# Altium PCB CH32xx0xV-R0-1v0.PcbDoc (part 2 of 3)
Units mil, origin at the board's own origin, x right, y up, seen from the top; angles counter-clockwise.
Board outline 3661.42 x 3267.72 mil, 2 copper layers (Top Layer, Bottom Layer); 68 components, 119 nets, 417 pads, 746 vias.
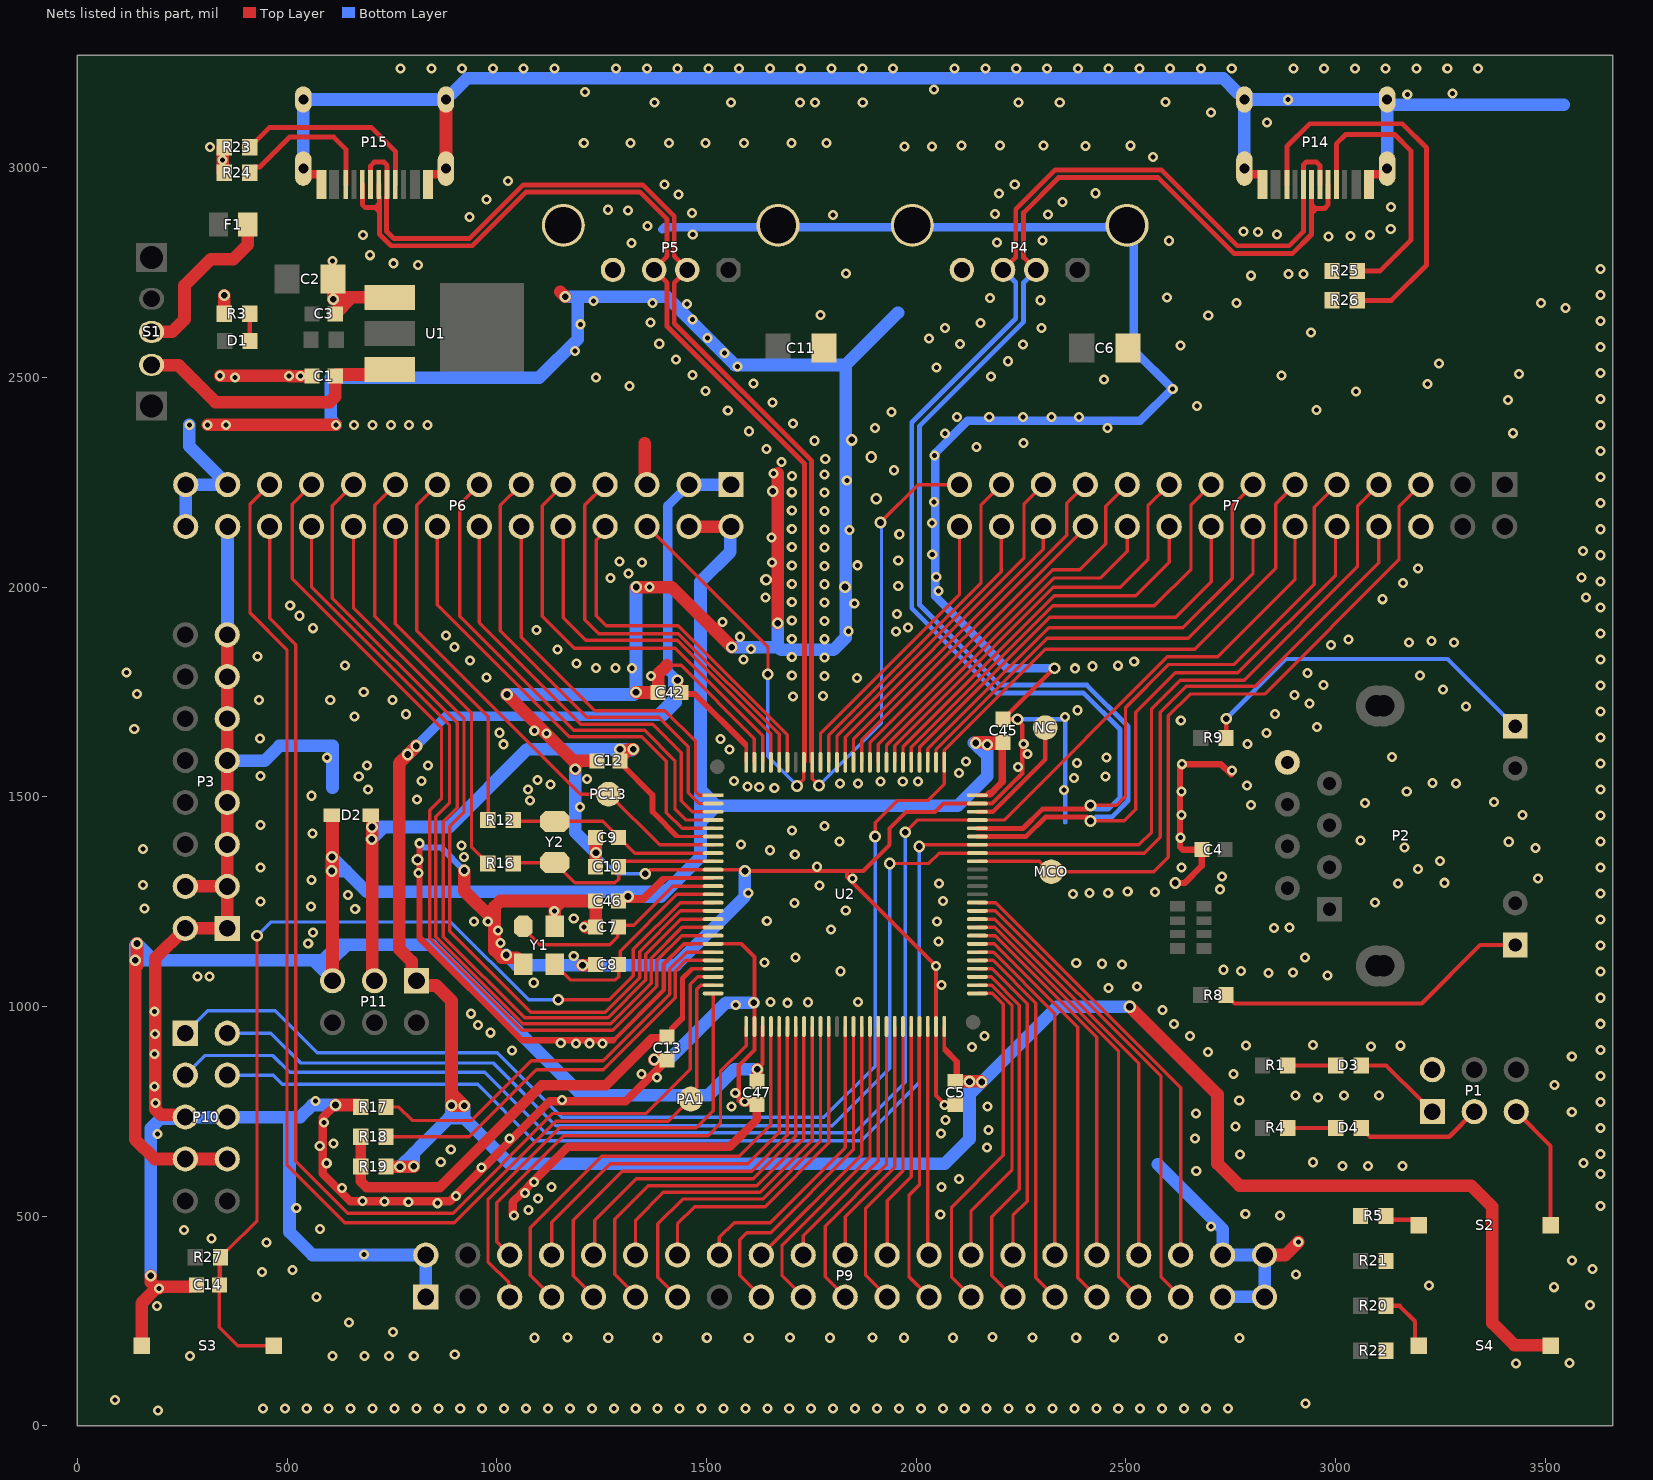
[diagram p2: the nets of this part, all layers, seen from the top]

## Via types
v1: diameter 24, hole 12, Top Layer to Bottom Layer, tented both sides, 648 vias
v2: diameter 28, hole 16, Top Layer to Bottom Layer, tented both sides, 97 vias
v3: diameter 30, hole 18, Top Layer to Bottom Layer, tented both sides, 1 vias

## Nets (pads, with @x,y where several pads share a name; then routed paths per layer and width w, separated by ;. In a path a pad name is that pad's centre, name@x,y a point inside that pad or via, vN(x,y) a via of type N, cw(c..) or ccw(c..) an arc to the next point about the centre after c; other vN are vias at no path point) (continued)
GND: C1.2 C2.2 C3.2 C4.1 C5.2 C6.2 C7.1 C8.1 C9.1 C10.1 C11.2 C12.1 C13.2 C14.1 C42.1 C45.2 C46.2 C47.1 P1.2 P2.8 P3.1 P3.2 P3.3 P3.4 P3.5 P3.7 P3.9 P3.11 P3.13 P3.15 P4.0 P4.4 P5.0 P5.4 P6.5 P6.25 P6.26 P6.27 P6.28 P7.6 P9.1 P9.2 P9.39 P9.40 P9.41 P9.42 P10.5 P10.6 P14.0 P14.A1 P14.B1 P15.0 P15.A1 P15.B1 R3.2 R5.1 R17.1 R21.2 R22.2 R23.2 R24.2 R25.2 R26.2 S3.1 U1.1 U2.10 U2.19 U2.27 U2.49 U2.74 U2.99 Y1.2 Y1.4 | length 26517
  Top Layer w8: 1364.22,1326.45 U2.10@1515.75,1326.45 1515.94,1326.26 v2@1588.24,1326.26 ; 1405.24,1813.28 1439.47,1813.28 1614.17,1638.58 U2.99@1614.17,1582.36 ; 1464.71,1149.29 U2.19@1515.75,1149.29 1583.24,1149.29
  Top Layer w10: C2.2@609.71,2734.59 611.56,2732.74 C2.2@611.56,2709.67 ; C2.2@612.21,2756.59 C2.2@614.72,2754.08 ; C3.2@614.72,2651.67 C2.2@614.72,2701.58 ; 1277.95,919.19 1398.11,1039.35 1398.11,1101.2 1446.2,1149.29 1464.71,1149.29 ; 1583.24,1149.29 1614.17,1118.36 U2.27@1614.17,952.44 1614.17,896.1 1577.04,858.97 1577.04,774.62 1585.29,766.37 C47.1@1620.21,766.37 ; v2@1588.24,1326.26 v2(1591.64,1322.86) 1834.86,1322.86 ; C5.2@2093.21,766.36 2068.86,766.36 2047.24,787.97 U2.49@2047.24,952.44 v1(2047.24,1096.4) 1834.86,1308.78 1834.86,1322.86 ; v2(2329.66,1806.6) 2328.94,1806.6 C45.2@2207.3,1684.96 v2(2241.77,1684.96) 2241.77,1682.65 2252.86,1671.56 2252.86,1637.45 2253.73,1636.57 2253.73,1626.93 2252.86,1626.05 2253.73,1625.18 2253.73,1615.53 2252.86,1614.66 2252.86,1555.73 2224.09,1526.97 2181.06,1483.93 U2.74@2145.67,1483.93 2064.97,1483.93 2045,1463.95 1975.96,1463.95 1936.47,1424.46 1936.47,1385.48 1873.85,1322.86 1834.86,1322.86
  Top Layer w15: v1@815.67,1379.21 815.67,1163.41 1059.89,919.19 1277.95,919.19 ; v2(2617.76,1294.49) 2640.39,1294.49 2681.03,1335.14 C4.1@2681.03,1374.02 ; v1@2632.22,1577.36 2628.8,1573.94 2628.8,1380.61 2635.39,1374.02 C4.1@2681.03,1374.02 ; v1(2633.76,1577.68) 2633.87,1577.79 2726.78,1577.79 v1@2751.11,1553.47 ; C4.1@2681.03,1374.36 C4.1@2681.03,1374.02
  Top Layer w20: P15.0@538.56,2998.15 538.56,2993.36 547.51,2984.41 579.86,2984.41 581.67,2982.6 P15.B1@581.67,2959.96 ; v2(615.18,765.16) 584.7,734.68 584.7,601.62 650.86,535.45 887.67,535.45 1126.57,774.35 1307.98,774.35 C13.2@1406.03,872.4 ; P15.A1@835.61,2959.96 835.61,2982.6 837.42,2984.41 869.77,2984.41 878.72,2993.36 P15.0@878.72,2998.15 ; v1@1039.94,502.38 1039.94,503.15 1037.84,505.26 1037.84,533.65 1058.53,554.34 1065.69,554.34 1066.23,554.88 v1@1066.23,556.42 ; v1@1063.41,559.23 v1@1087.61,583.43 ; v1@1087.74,583.3 1089.27,583.3 1089.81,583.84 1089.81,585.62 1169.81,665.63 1555.42,665.63 1620.21,730.42 C47.1@1620.21,766.37 ; P14.0@2782.7,2998.15 2782.7,2993.36 2791.64,2984.41 2824,2984.41 2825.81,2982.6 P14.B1@2825.81,2959.96 ; P14.A1@3079.74,2959.96 3079.74,2982.6 3081.56,2984.41 3113.91,2984.41 3122.85,2993.36 P14.0@3122.85,2998.15
  Top Layer w30: S3.1@153.21,191.36 153.21,292.44 185.42,324.65 v1@185.42,332.06 ; v2(174.88,357.77) 174.88,342.6 v1@185.42,332.06 ; v1(194.6,327.96) 189.52,327.96 v1@185.42,332.06 ; P10.5@257.21,736.36 251.47,742.1 198.44,742.1 185.26,755.28 v1(185.26,934.84) 185.26,1114.41 P3.2@257.21,1186.36 P3.1@357.21,1186.36 P3.3@357.21,1286.36 ; P3.4@257.21,1286.36 P3.3@357.21,1286.36 ; C14.1@283.44,336.36 280.44,333.36 268.56,333.36 267.26,332.06 v1@185.42,332.06 ; v1(310.42,2386.99) v1(354.11,2386.99) v1(616.26,2386.99) ; v1(340.29,2504.04) 505.7,2504.04 v1(504.86,2503.21) v1(532.28,2503.21) C1.2@559.71,2503.21 ; R24.2@346.04,2988 R23.2@346.04,3048.82 ; R3.2@350.14,2651.66 v2(350.14,2696.05) ; P3.15@357.21,1886.36 357.71,1886.36 357.21,1885.86 357.21,1786.86 357.71,1786.36 357.21,1785.86 P3.11@357.21,1686.36 P3.9@357.21,1586.36 P3.7@357.21,1486.36 P3.5@357.21,1386.36 P3.3@357.21,1286.36 ; C2.2@609.71,2734.59 609.05,2733.94 609.05,2712.18 611.56,2709.67 609.96,2708.07 v2(609.96,2686.32) ; C3.2@614.72,2651.67 653.76,2690.71 ; C2.2@614.72,2701.58 625.59,2690.71 U1.1@744.97,2690.71 U1.1@754.97,2690.71 ; v2(615.18,765.16) 670.24,765.16 670.85,764.55 671.84,764.55 675.15,761.24 R17.1@675.15,760.26 ; P15.0@878.72,2998.15 P15.0@878.72,3162.71 ; v2(922.19,1324.13) 922.19,1275.99 994.38,1203.8 ; v2@1011.96,1116.6 994.38,1134.18 994.38,1203.8 ; v2@1015.82,1116.6 1046.96,1116.6 1052.62,1110.95 1056.56,1110.95 1063.21,1104.3 Y1.2@1063.21,1100.36 ; v2(1024.15,1743.93) 1182.39,1585.69 1199.47,1585.69 ; Y1.4@1138.01,1190.91 1138.01,1233.66 1155.83,1251.48 ; 1151.69,2703.86 v2(1163.05,2692.5) ; v2(1186.92,1565.65) 1186.92,1573.14 1199.47,1585.69 ; v2(1204.2,1098.6) 1234.27,1098.6 C8.1@1235.4,1099.73 ; v1@1212.33,1189.52 1234.99,1189.52 C7.1@1235.4,1189.11 C46.2@1235.39,1251.48 1155.83,1251.48 ; C10.1@1235.4,1333.23 C9.1@1235.4,1402.61 ; C12.1@1238.69,1585.69 1199.47,1585.69 ; v2(1331.85,1749.37) 1332.53,1748.68 C42.1@1384.49,1748.68 1384.49,1792.53 1405.24,1813.28 ; v2(1332.61,2000.18) 1416.87,2000.18 v2(1560.42,1856.63) ; 1352.52,2343.09 1352.52,2250.04 P6.5@1358.21,2244.36 ; v2(1375.46,873.41) 1403.46,873.41 1404.24,874.19 C13.2@1406.03,872.4 ; v2(1669.62,1913.93) v1@1669.62,2270.87 ; P9.42@2830.71,407.44 2880.08,407.44 v1(2911.05,438.41) ; 994.38,1203.8 994.38,1237.5 1008.37,1251.48 1155.83,1251.48
  Bottom Layer w8: v2(1236.3,1366.46) 1286.52,1316.25 v2(1354.01,1316.25)
  Bottom Layer w10: v2(2241.77,1684.96) 2355.18,1684.96 2355.18,1438.4
  Bottom Layer w15: v1@815.67,1379.21 867.11,1379.21 v2(922.19,1324.13)
  Bottom Layer w20: 1394.51,2852.66 1399.51,2857.66 2502.7,2857.66 2518.46,2841.9 2518.46,2565.52 v1(2611.69,2472.29) ; v2(2329.66,1806.6) 2216.8,1806.6 2045.84,1977.55 2045.84,2320.25 2122.33,2396.74 2533.85,2396.74 v1@2610.92,2473.81
  Bottom Layer w30: v2(174.88,357.77) 174.88,709.7 197.21,732.03 252.88,732.03 P10.5@257.21,736.36 P10.6@357.21,736.36 505.67,736.36 ; P6.28@258.21,2144.36 P6.27@258.21,2244.36 P6.25@358.21,2244.36 266.34,2336.23 v1@266.34,2386.59 ; P3.9@357.21,1586.36 446.8,1586.36 481.8,1621.36 608.21,1621.36 608.21,1521.36 ; P3.15@357.21,1886.36 357.71,1886.86 357.71,2143.86 P6.26@358.21,2144.36 ; P15.0@538.56,2998.15 P15.0@538.56,3162.71 P15.0@878.72,3162.71 878.72,3171.99 883.05,3176.32 892.32,3176.32 929.72,3213.71 2731.7,3213.71 2769.09,3176.32 2778.37,3176.32 2782.7,3171.99 P14.0@2782.7,3162.71 ; v2(615.18,765.16) 560.03,765.16 531.22,736.36 505.67,736.36 ; v1(616.26,2386.99) 604,2399.24 604,2499.25 1100.67,2499.25 1193.06,2591.65 1193.06,2692.5 ; P9.1@830.71,307.44 P9.2@830.71,407.44 560.54,407.44 505.67,462.31 505.67,736.36 ; v2(1022.37,1122.92) 1046.69,1098.6 v2(1204.2,1098.6) 1427.65,1098.6 1591.64,1262.59 v2(1591.64,1322.86) ; v2(1024.15,1743.93) 1326.41,1743.93 v2(1331.85,1749.37) 1331.85,1999.41 v2(1332.61,2000.18) ; v2(1163.05,2692.5) 1193.06,2692.5 ; v2(1186.92,1565.65) 1186.92,1415.84 v2(1236.3,1366.46) ; v2(1375.46,873.41) 1410.99,873.41 1546.82,1009.23 v2(1612.92,1009.23) ; v2(1560.42,1856.63) 1671.57,1856.63 ; v2(1669.62,1913.93) 1669.62,1858.58 1671.57,1856.63 ; 1956.65,2654.66 1831.65,2529.66 ; 2576.15,623.54 2730.71,468.98 P9.40@2730.71,407.44 P9.42@2830.71,407.44 P9.41@2830.71,307.44 P9.39@2730.71,307.44 ; P14.0@2782.7,2998.15 P14.0@2782.7,3162.71 ; P14.0@3122.85,2998.15 P14.0@3122.85,3154.52 ; 3544.32,3150.19 3127.18,3150.19 P14.0@3122.85,3154.52 ; 1193.06,2692.5 1405.12,2692.5 1567.96,2529.66 1831.65,2529.66 ; 1671.57,1856.63 1677.92,1850.28 1802.63,1850.28 1831.65,1879.31 1831.65,2529.66 ; P14.0@2782.7,3162.71 P14.0@3122.85,3162.71 P14.0@3122.85,3154.52
  other v1: 191.6,36.82 442.13,41.5 494.43,41.5 546.73,41.5 599.03,41.5 651.32,41.5 703.62,41.5 755.92,41.5 808.22,41.5 860.52,41.5 912.82,41.5 965.12,41.5 1017.42,41.5 1069.72,41.5 1122.02,41.5 1174.32,41.5 1226.62,41.5 1278.92,41.5 1331.22,41.5 1383.52,41.5 1435.82,41.5 1488.12,41.5 1540.41,41.5 1592.71,41.5 1645.01,41.5 1697.31,41.5 1749.61,41.5 1801.91,41.5 1854.21,41.5 1906.51,41.5 1958.81,41.5 2011.11,41.5 2063.41,41.5 2115.71,41.5 2168.01,41.5 2220.31,41.5 2272.61,41.5 2324.91,41.5 2377.2,41.5 2429.5,41.5 2481.8,41.5 2534.1,41.5 2586.4,41.5 2638.7,41.5 2691,41.5 2743.3,41.5 2928.04,53.07 89.88,61.94 3429.78,148.85 3557.96,150.13 268.2,166.17 607.92,166.19 684.5,166.19 743.23,166.19 801.96,166.19 899.65,170.11 2588.78,208.08 1600.73,209.45 1089.54,210.13 1265.72,210.13 1383.18,210.13 1500.64,210.13 1699,210.78 1794.28,210.13 1895.54,210.78 1970.47,210.13 2087.93,210.13 2277.32,210.78 2381.57,210.13 2471.19,210.38 2771.38,209.92 1168.06,211.08 2182.38,212.1 752.38,224.25 647.76,246.19 189.7,285.56 3606.24,288.27 569.59,307.27 3520.68,330.63 3223.25,334.54 2905.17,361.29 440.25,367.1 512.58,371.6 3612.17,373.83 3563.88,394.17 683.72,408.85 450.3,437.43 319.53,446.87 253.81,466.97 578.08,469.44 2702.61,475.08 1040.71,501.3 2866.99,501.86 2057.41,503.6 2784.69,505.73 1075.69,514.87 521.78,519.31 3631.78,524.36 858.07,530.93 788.86,534.31 732.37,535.46 679.94,536.29 1098.59,542.55 902.67,548.33 1067.54,555.11 631.09,567.58 1130.56,569.74 2060.52,569.58 1089.04,581.99 2101.61,588.26 3631.78,600.23 2667.79,607.47 963.7,615.95 3016.4,619.76 3077.38,619.76 3159.75,619.76 594.4,626.24 3590.8,626.6 866.3,628.83 2946.2,628.64 2771.99,647.61 3631.78,648.49 890.21,659.37 2169.21,664.16 577.74,667.52 610.31,673.2 1030.74,685.31 2665.22,685.19 190.41,695.82 2059.15,697.65 2172.9,705.71 3631.78,710.55 2761.74,714.23 587.59,723.58 2069.8,729.59 2666.93,744.98 3563.19,748.55 1559.88,761.34 2169.67,761.57 2067.96,765.62 186.55,769.53 3631.78,772.62 1591.16,773.5 567.89,775.08 2770.28,775.73 1155.56,776.94 2957.91,782.59 2904.06,787.34 3103.63,787.34 3020.36,788.18 1568.53,793.49 183.66,809.03 3521.77,812.99 1382.05,830.54 3631.78,834.68 1345.34,839.54 2756.69,839.13 3563.19,880.87 183.74,886.43 2695.7,891.01 1036.03,895.07 3631.78,896.75 2133.52,902.97 3084.41,904.13 2786.56,906.72 3154.31,906.48 2945.84,908.01 1188.43,911.55 1252.38,911.55 1152.46,912.55 1220.65,912.3 2652.95,929.56 2162.45,930.01 985.13,937.47 954.96,955.46 2615.09,958.3 3631.78,958.81 938.61,982.77 183.3,987.76 2587.76,991.24 1569.73,1003.61 1693.2,1008.89 1741.54,1010.11 1652.18,1010.92 1860.98,1011.06 3631.78,1020.88 2458.12,1043.87 2526.14,1048.12 2060.66,1051.18 1088.08,1056.6 286.03,1071.34 314.43,1071.34 2980.38,1074.13 2840.2,1080.37 2898.9,1081.19 3631.78,1082.94 1819.45,1084.05 2774.17,1084.71 2732.3,1087.67 2490.71,1099.85 2443.24,1101.97 2381.6,1103.39 1638.14,1104.81 1712.36,1116.58 2927.41,1116.36 1183.44,1120.75 3631.78,1145 550.31,1150.17 1008.72,1151.66 2053.44,1155.11 561.8,1176.18 1003.1,1181.08 1796.64,1183.62 2853.68,1187 2890.63,1187.87 1207.4,1189.11 945.13,1202.27 2049.83,1202.74 978.44,1203.14 1643.7,1204.1 3631.78,1207.07 1183.44,1210.05 1137.01,1227.48 1831.98,1229.08 662.36,1232.84 159.59,1233.75 557.4,1237.99 1709.93,1246.75 3094.19,1248.26 436.16,1250.21 2063.54,1251.09 645.12,1265.53 2374.19,1268.2 3631.78,1269.13 1599.51,1270.38 2457.87,1270.71 2413.46,1270.94 2569.16,1272.79 2504.4,1274.67 2724.73,1279.51 1769.54,1288.64 156.18,1289.6 2054.16,1293.68 3148.33,1293.79 3259.69,1295.02 558.37,1301.49 1848.36,1305.25 3482.39,1305.28 2729.42,1310.23 812.88,1318.31 3196.69,1328.34 436.16,1331.67 2632.82,1331.21 3631.78,1331.2 1763.45,1333.21 3249.23,1346.7 921.99,1356.03 1710.47,1362.67 1651.74,1372.59 155.91,1375.99 3477.17,1378.33 3164.4,1379.3 915.38,1383.82 1582.01,1386.15 815.67,1389.21 3412.89,1392.84 1817.57,1393.49 3631.78,1393.26 3059.48,1396.25 2630.67,1402.45 560.24,1412.22 1704.04,1419.73 1781.52,1430.7 436.16,1432.49 3631.78,1455.32 3445.86,1456.6 2632.08,1456.87 1198.69,1476.21 2797.87,1480.91 3070.08,1485.27 3377.55,1487.43 1079.51,1490.71 810.12,1493.85 558,1502.57 2633.03,1512.23 3169.7,1512.83 2352.6,1516.24 693.14,1517.5 1074.07,1516.99 3631.78,1517.39 1661.58,1521.45 1625.79,1523.67 1597.73,1524.11 2788.76,1527.04 1128,1529.68 1861.36,1531.23 1818.03,1532.25 3287.33,1531.9 3231.21,1533.2 1914.55,1536.36 1967.9,1536.36 2004.51,1536.36 1565.36,1537.46 819.89,1538.08 1096.73,1540.1 1215.41,1542.81 2376.71,1544.93 670.8,1548.46 2450.88,1548.51 436.16,1549.55 2101.58,1556.49 2752.95,1562.67 2242.32,1571.08 690.69,1574.76 835.83,1574.6 3631.78,1579.45 2383.22,1580.13 2118.89,1584.5 594.92,1593.21 2453.43,1593.58 3134.73,1594.43 2264.98,1602.09 1554.56,1612.67 1015.77,1625.26 2256.41,1626.05 2790.41,1626.37 1533.76,1637.6 434.97,1639.49 3631.78,1641.52 1118.89,1650.59 1006.09,1652.78 2835.75,1652.32 1089.29,1657.55 135.45,1661.76 2955.65,1666.03 2630.88,1681.54 2355.18,1690.68 660.43,1691.46 783.45,1696.86 2855.76,1697.36 3631.78,1703.58 2384.12,1706.38 3311.35,1715.83 2937.33,1722.19 433.34,1730.68 602.82,1730.66 751.08,1731.25 1706.45,1738.7 1777.36,1740.63 2902.45,1742.28 141.54,1745.31 682.7,1750.42 3256.09,1756.29 3631.78,1765.64 2971.02,1767.11 1859.2,1783.64 975.01,1784.57 1367.66,1787.82 1780.94,1788.36 3201.33,1788.86 1703.32,1789.34 2933.19,1794.89 116.64,1796.56 1322.78,1806.58 2379.11,1806.49 1236.04,1807.15 1283.46,1807.15 2420.78,1811.35 2481.46,1812.56 637.73,1813.42 1189.77,1817.56 2519.89,1823.08 936.11,1824.63 1588.44,1827.6 3631.78,1827.71 1780.94,1832.05 1703.32,1833.04 429.43,1835.09 1144.27,1851.74 1605.68,1852.01 898.95,1857.15 2989.59,1861.54 3282.71,1867.52 3175.08,1868.24 3228.53,1871.13 1780.94,1875.74 3030.51,1875.18 1703.32,1876.73 1579.34,1881.7 878.63,1884.44 3631.78,1889.77 1838.68,1894.74 1951.85,1894.55 1094.71,1897.33 561.82,1902 1980.19,1903.96 1537.69,1916.65 1780.94,1919.44 1703.32,1920.42 529.71,1931.7 1954.06,1935.7 3631.78,1951.84 507.38,1956.39 1852.32,1961.15 1780.94,1963.13 1703.32,1964.11 3112.33,1971.12 1640.74,1975.45 3596.78,1974.93 2053.09,1991.2 1363.69,2000.75 1957.17,2002.27 1780.94,2006.82 1703.32,2007.8 3160.54,2009.6 3631.78,2013.9 1270.96,2021.41 2047.84,2023.64 3586.53,2023.19 1314.37,2032.85 3196.58,2044.66 1780.94,2050.51 1703.32,2051.49 1859.85,2052.08 1655.66,2058.22 1345.94,2058.89 1292.27,2061.26 1957.17,2063.87 3631.78,2075.96 2038.27,2077.79 3590.15,2085.93 1780.94,2094.2 1703.32,2095.19 1654.6,2118.22 1959.66,2126.09 1841.14,2135.83 1780.94,2137.89 3631.78,2138.03 1703.32,2138.88 2037.58,2153.23 1780.94,2181.59 1703.32,2182.57 3631.78,2200.09 2042.38,2203.29 1780.94,2225.28 1703.32,2226.26 1834.47,2254.04 3631.78,2262.16 1703.8,2264.95 1780.94,2268.97 1659.87,2270.87 1946.73,2278.68 1679.23,2298.32 1783.16,2305.56 2044.04,2314.11 3631.78,2324.22 1642.91,2329.76 2143.83,2334.55 2255.47,2343.57 1757.61,2349 2068.99,2366.11 3422.65,2366.96 1601,2371.67 1901.4,2378.97 2456.31,2379.13 3631.78,2386.29 266.73,2386.99 659.95,2386.99 703.64,2386.99 747.33,2386.99 791.03,2386.99 834.72,2386.99 1706.5,2389.89 2097.23,2405.76 2174.15,2405.76 2254.35,2405.76 2323.08,2405.76 2387.73,2405.76 1940.79,2417.32 1550.71,2421.26 2954.33,2421.86 2670.05,2431.96 1657.19,2440.37 3411.39,2445.76 3631.78,2448.35 3048.92,2466.02 1497.62,2468.06 1316.73,2479.4 3219.2,2483.99 1611.57,2485.59 2447.46,2494.95 375.87,2499.78 1236.7,2499.87 2178.87,2502.27 2871.5,2504.43 1466.89,2505.78 3437.28,2507.67 3631.78,2510.41 2048,2524.09 1573.45,2526.2 3247.04,2533.56 2218.7,2538.63 1427.54,2543.09 1542.72,2558.44 1186.69,2562.89 3631.78,2572.48 2630.44,2575.94 2254.19,2578.45 2104.1,2579.33 1387.28,2580.32 2030.88,2592.48 1502.7,2594.46 2940.98,2607.32 2069.14,2618.29 2298.34,2618.27 1199.9,2626.74 2153.3,2630.25 1366.94,2631.39 3631.78,2634.54 1466.34,2637.79 1771.55,2648.55 2696.39,2648.02 3548.2,2665.51 1453.28,2675.49 1371.01,2677.04 2763.87,2677.16 3489.38,2677.15 1230.72,2681.78 2296.61,2684.06 2175.74,2689.8 2598.24,2690.96 3631.78,2696.61 2798.27,2742.5 1833.07,2747.49 2887.24,2746.86 2923.15,2747.09 3631.78,2758.67 812.45,2768.2 754.07,2772.2 608.21,2777.59 698.09,2791.39 1320.63,2820.51 2193.07,2821.72 2301.5,2826.65 2602.84,2825.92 2983.58,2836.04 3035.83,2837.6 681.3,2839.37 3082.38,2839.67 1467.16,2840.68 2860.41,2840.72 2815.04,2846.77 2779.95,2847.98 3131.52,2854.15 1358.94,2860.84 935.29,2882.99 1801.11,2887.1 2313.82,2888.26 2188.14,2889.9 1465.81,2891.76 1312.56,2897.81 1264.84,2899.83 3132.55,2906.91 2349.15,2918.65 975.83,2923.98 1433.55,2936.12 2197.18,2938.37 2427.19,2939.19 1399.94,2959.65 2234.96,2959.73 1026.17,2968.09 346.04,3018.41 2565.08,3025.24 316.42,3049.42 1971.85,3051.05 2037.48,3051.05 2403.41,3051.61 2108.37,3052.8 2200.27,3052.8 2303.54,3052.8 2511.48,3052.48 1207.35,3058.85 1319.05,3058.85 1410.8,3058.85 1497.9,3058.85 1589.55,3058.85 1702.62,3058.85 1786.25,3058.85 2836.88,3108.26 2702.86,3131.89 1375.5,3155.42 1558.35,3155.42 1723.23,3155.42 1758.19,3155.42 1872.57,3155.42 2243.94,3155.42 2342.3,3155.42 2594.75,3157.08 2886.33,3162.21 3170.96,3174.28 3279.3,3176.67 1210.2,3180.77 2042.01,3186.96 770.41,3236.57 843.82,3236.57 917.23,3236.57 990.63,3236.57 1064.04,3236.57 1137.45,3236.57 1284.27,3236.57 1357.68,3236.57 1431.09,3236.57 1504.5,3236.57 1577.91,3236.57 1651.32,3236.57 1724.73,3236.57 1798.14,3236.57 1871.55,3236.57 1944.95,3236.57 2091.77,3236.57 2165.18,3236.57 2238.59,3236.57 2312,3236.57 2385.41,3236.57 2458.82,3236.57 2532.23,3236.57 2605.64,3236.57 2679.05,3236.57 2752.46,3236.57 2899.27,3236.57 2972.68,3236.57 3046.09,3236.57 3119.5,3236.57 3192.91,3236.57 3266.32,3236.57 3339.73,3236.57
  other v2: 810.67,1350.21 1830.1,2000.28 1642.14,2017.8 1904.85,2211.01 1658.22,2228.32 1892.87,2310.07 1846.2,2351.07
KEY: P1.5 S2.1 | length 304.5
  Top Layer w10: P1.5@3430.77,749.27 3512.71,667.33 S2.1@3512.71,478.75
LED1: D3.2 P1.1 | length 215.5
  Top Layer w10: D3.2@3060.84,859.36 3120.68,859.36 3205.77,774.27 P1.1@3230.77,749.27
LED2: D4.2 P1.3 | length 303.4
  Top Layer w10: D4.2@3060.84,710.36 3066.73,704.47 3081.73,689.47 3270.96,689.47 P1.3@3330.77,749.27
MCO: MCO.1 P7.5 U2.67 | length 1721.9
  Top Layer w8: U2.67@2145.67,1346.14 2293.92,1346.14 2318.7,1321.36 MCO.1@2322.21,1321.36 2566.74,1321.36 2600.91,1355.53 2600.91,1692.79 2653.19,1745.07 2830.6,1745.07 3151.06,2065.52 3151.06,2192.21 P7.5@3203.21,2244.36
NC: NC.1 U2.73 | length 289.7
  Top Layer w10: U2.73@2145.67,1464.25 2183.05,1464.25 2307.69,1588.88 NC.1@2307.69,1664.95
NetC1_1: C1.1 S1.2 U1.3 | length 670.4
  Top Layer w30: S1.2@177.31,2530.61 179.28,2528.64 241.52,2528.64 329.13,2441.02 601.53,2441.02 614.71,2454.2 C1.1@614.71,2503.21 ; C1.1@618.45,2506.95 743.21,2506.95 U1.3@754.97,2518.71
NetD1_2: D1.2 R3.1 | length 65
  Top Layer w10: R3.1@410.77,2651.66 410.77,2587.61 D1.2@411.46,2586.93
NetD3_1: D3.1 R1.2 | length 111.1
  Top Layer w10: R1.2@2886.21,859.36 2995.95,859.36 D3.1@2996.93,860.34
NetD4_1: D4.1 R4.2 | length 112.5
  Top Layer w10: R4.2@2886.21,710.36 2996.68,710.36 D4.1@2998.15,711.82
NetF1_2: F1.2 S1.1 | length 410.2
  Top Layer w30: S1.1@177.31,2609.35 226.23,2609.35 255.27,2638.39 255.27,2719.3 317.98,2782.01 371.72,2782.01 406.25,2816.54 F1.2@406.25,2864.6
NetP2_9: P2.9 R8.2 | length 756.3
  Top Layer w10: R8.2@2738.84,1027.36 2738.84,1026.37 2752.15,1013.07 2753.13,1013.07 2759.39,1006.81 3205.36,1006.81 3344.83,1146.28 3428.13,1146.28 P2.9@3428.21,1146.36
NetP2_12: P2.12 R9.2 | length 860.6
  Top Layer w10: R9.2@2738.84,1640.36 2739.31,1640.83 v2(2739.31,1686)
  Bottom Layer w10: v2(2739.31,1686) 2882.21,1828.9 3267.32,1828.9 P2.12@3428.21,1668.01
NetP14_A5: P14.A5 R25.1 | length 670.9
  Top Layer w11.8: P14.A5@3001.99,2959.96 3001.99,3057.06 3024.06,3079.14 3140.98,3079.14 3179.6,3040.52 3179.6,2827.45 3106.21,2754.06 R25.1@3051.97,2754.06
NetP14_B5: P14.B5 R26.1 | length 949
  Top Layer w11.8: P14.B5@2883.88,2959.96 2883.88,3050.78 2938.02,3104.92 3159.1,3104.92 3216.7,3047.32 3216.7,2767.57 3133.03,2683.9 R26.1@3051.97,2683.9
NetP15_A5: P15.A5 R23.1 | length 469.6
  Top Layer w11.8: R23.1@410.77,3048.82 458.43,3096.48 700.59,3096.48 758.16,3038.91 P15.A5@758.16,2960.27
NetP15_B5: P15.B5 R24.1 | length 360.8
  Top Layer w11.8: R24.1@410.77,2988 410.77,2988.94 423.18,3001.35 434.01,3001.35 505.55,3072.89 611.26,3072.89 640.05,3044.1 P15.B5@640.05,2960.27
NetR5_2: R5.2 S2.2 | length 86.7
  Top Layer w10: R5.2@3120.1,500.58 3129.37,491.32 3185.19,491.32 S2.2@3197.75,478.75
NetR20_2: R20.2 S4.2 | length 146.3
  Top Layer w10: R20.2@3120.1,286.28 3152.88,286.28 3189.73,249.43 3189.73,199.38 S4.2@3197.75,191.36
NRST: C14.2 R27.1 S3.2 U2.14 | length 2493.5
  Top Layer w8: C14.2@338.44,339.41 338.44,400.24 355.56,417.35 356.54,417.35 428.23,489.04 v2(428.23,1168.52) ; C14.2@341.25,339.41 R27.1@341.25,402.06 ; C14.2@341.37,339.29 338.2,336.11 338.2,235.13 381.97,191.36 S3.2@468.17,191.36 ; v2(1146.21,1016.36) 1268.32,1016.36 1325.22,1073.27 1325.22,1136.13 1436.81,1247.71 U2.14@1515.75,1247.71
  Bottom Layer w8: v2(428.23,1168.52) 461.05,1201.34 890.69,1201.34 1075.67,1016.36 v2(1146.21,1016.36)
PA0: P6.24 U2.23 | length 2937.4
  Top Layer w8: P6.24@458.21,2144.36 458.21,1925.41 520.69,1862.93 520.69,631.1 644.51,507.28 896.02,507.28 1133.65,744.91 1356.33,744.91 1461.51,850.1 1461.51,1052.59 1479.47,1070.55 U2.23@1515.75,1070.55
PA1: P6.23 PA1.1 U2.24 | length 3133.9
  Top Layer w8: P6.23@458.21,2244.36 411.46,2197.61 411.46,1938.62 499.57,1850.51 499.57,622.9 637.74,484.73 898.26,484.73 1140.09,726.56 1409.33,726.56 PA1.1@1464.81,782.03 ; PA1.1@1462.18,779.41 1462.18,793.22 1476.75,807.79 1476.75,1041.35 1486.27,1050.86 U2.24@1515.75,1050.86
PA2: P9.5 U2.25 | length 1158.1
  Top Layer w8: P9.5@1030.71,307.44 1028.13,310.02 1028.13,341.92 978.84,391.21 978.84,539.44 1150.04,710.65 1475.14,710.65 1515.75,751.26 U2.25@1515.75,1031.18
PA3: P9.6 U2.26 | length 1006.3
  Top Layer w8: P9.6@1030.71,407.44 999.41,438.74 999.41,532.39 1159.07,692.05 1503.6,692.05 1533.2,721.65 1533.2,845.19 1594.49,906.48 U2.26@1594.49,952.44
PA4: P9.7 U2.29 | length 1096.5
  Top Layer w8: P9.7@1130.71,307.44 1079.47,358.68 1079.47,472.38 1249.98,642.89 1578.54,642.89 1653.54,717.9 U2.29@1653.54,952.44
PA5: P9.8 U2.30 | length 962.1
  Top Layer w8: P9.8@1130.71,407.44 1130.71,485.45 1270.22,624.95 1598.55,624.95 1673.23,699.63 U2.30@1673.23,952.44
PA6: P9.9 U2.31 | length 1057.6
  Top Layer w8: P9.9@1230.71,307.44 1230.71,309.63 1182.08,358.26 1182.08,490.54 1298.83,607.29 1607.59,607.29 1692.91,692.61 U2.31@1692.91,952.44
PA7: P9.10 U2.32 | length 908.4
  Top Layer w8: P9.10@1230.71,407.44 1233.28,410.01 1233.28,490.69 1331.94,589.35 1611.53,589.35 1712.6,690.42 U2.32@1712.6,952.44
PA9: P7.8 P10.2 U2.68 | length 3940
  Top Layer w8: v2(1936.96,1341.09) 2029.87,1341.09 2054.6,1365.82 U2.68@2145.67,1365.82 2543.46,1365.82 2581.64,1404 2581.64,1701.92 2643.45,1763.73 2808.86,1763.73 3103.21,2058.08 P7.8@3103.21,2144.36
  Bottom Layer w8: P10.2@357.21,936.36 461.11,936.36 532.21,865.26 991.72,865.26 1141.06,715.93 1799.91,715.93 1936.96,852.98 v2(1936.96,1341.09)
PA10: P7.7 P10.4 U2.69 | length 4045.8
  Top Layer w8: v2(2007.19,1381.59) 2012.6,1381.59 2016.52,1385.51 U2.69@2145.67,1385.51 2531.13,1385.51 2561.18,1415.55 2561.18,1709.91 2629.34,1778.07 2782.17,1778.07 3052.1,2048 3052.1,2193.25 P7.7@3103.21,2244.36
  Bottom Layer w8: P10.4@357.21,836.36 466.75,836.36 488.73,814.38 954.32,814.38 1088.49,680.21 1868.6,680.21 2007.19,818.8 v2(2007.19,1381.59)
PA11: P4.2 P7.10 P14.A7 P14.B7 U2.70 | length 4394
  Top Layer w8: v2(2415.37,1442.54) 2495.73,1442.54 2523.11,1469.92 2523.11,1701.57 2617.15,1795.61 2767.27,1795.61 2999.88,2028.22 2999.88,2141.03 P7.10@3003.21,2144.36
  Top Layer w11.8: U2.70@2145.67,1405.19 2146.11,1405.64 2262.42,1405.64 2308.42,1451.64 2360.46,1451.64 2406.27,1451.64 v2(2415.37,1442.54) ; P4.2@2286.16,2756.36 2256.19,2786.33 2256.19,2893.08 2339.45,2976.34 2576.93,2976.34 2758.13,2795.14 2896.95,2795.14 2942.49,2840.68 2942.49,2891.63 ; P14.A7@2942.93,2959.96 2942.93,2931.42 2942.49,2930.97 2942.49,2911.61 ; P14.B7@2982.3,2959.96 2982.3,2911.75 2973.51,2902.95 2953.81,2902.95 ; 2942.49,2891.63 2942.49,2902.95 ; 2942.49,2891.63 2953.81,2902.95 ; 2942.49,2902.95 2951.15,2902.95 ; 2942.49,2902.95 2942.49,2911.61 ; 2942.49,2911.61 2951.15,2902.95 ; 2951.15,2902.95 2953.81,2902.95
  Bottom Layer w11.8: P4.2@2286.16,2756.36 2256.19,2726.39 2256.19,2632.76 2008.19,2384.75 2008.19,1957.47 2199.52,1766.14 2407.03,1766.14 2505.01,1668.15 2505.01,1490.68 2465.97,1451.64 2428.65,1451.64 2419.55,1442.54 v2(2415.37,1442.54)
PA12: P4.3 P7.9 P14.A6 P14.B6 U2.71 | length 4437.1
  Top Layer w8: v2(2415.37,1479.54) 2477.67,1479.54 2499.08,1500.94 2499.08,1712.43 2602.2,1815.55 2758.6,1815.55 2949.56,2006.51 2949.56,2190.71 P7.9@3003.21,2244.36
  Top Layer w11.8: U2.71@2145.67,1424.88 2146.11,1424.44 2254.63,1424.44 2300.63,1470.44 2393.52,1470.44 2406.27,1470.44 v2(2415.37,1479.54) ; P4.3@2207.42,2756.36 2237.39,2786.33 2237.39,2900.87 2331.66,2995.14 2584.72,2995.14 2765.92,2813.94 2889.16,2813.94 2923.69,2848.47 2923.69,2903.82 2923.69,2930.97 2923.25,2931.42 P14.B6@2923.25,2959.96 2923.25,3006.46 2930.74,3013.96 2954.17,3013.96 2962.62,3005.52 P14.A6@2962.62,2959.96
  Bottom Layer w11.8: P4.3@2207.42,2756.36 2237.39,2726.39 2237.39,2640.54 1989.39,2392.54 1989.39,1949.68 2191.74,1747.34 2399.24,1747.34 2486.21,1660.36 2486.21,1498.47 2458.18,1470.44 2428.65,1470.44 2419.55,1479.54 v2(2415.37,1479.54)
PA13: P7.12 P10.3 U2.72 | length 3763.7
  Top Layer w8: v2(1973.71,1415.58) 2002.69,1444.56 U2.72@2145.67,1444.56 2209.81,1444.56 2599.01,1833.76 2719.34,1833.76 2903.21,2017.63 P7.12@2903.21,2144.36
  Bottom Layer w8: P10.3@257.21,836.36 303.85,883 466.32,883 506.19,843.13 971.45,843.13 1115.61,698.97 1853.17,698.97 1973.71,819.51 v2(1973.71,1415.58)
PA14: P7.11 P10.1 U2.76 | length 3875.4
  Top Layer w8: v2(1902.03,1405.61) 1902.03,1438.61 1954.47,1491.05 2027.53,1491.05 2066.93,1530.45 2066.93,1611.44 2307.71,1852.22 2664.34,1852.22 2857.04,2044.92 2857.04,2198.19 P7.11@2903.21,2244.36
  Bottom Layer w8: P10.1@257.21,936.36 310.43,989.58 471.32,989.58 571.34,889.56 1000.79,889.56 1154.57,735.79 1779.91,735.79 1902.03,857.91 v2(1902.03,1405.61)
PA15: P7.14 U2.77 | length 1072
  Top Layer w8: U2.77@2047.24,1582.36 2047.24,1612.97 2312.49,1878.21 2648.5,1878.21 2803.21,2032.92 P7.14@2803.21,2144.36
PB0: P9.13 U2.35 | length 937.3
  Top Layer w8: P9.13@1430.71,307.44 1383.41,354.74 1383.41,481.48 1442.8,540.87 1633.74,540.87 1771.65,678.78 U2.35@1771.65,952.44
PB1: P9.14 U2.36 | length 792.5
  Top Layer w8: P9.14@1430.71,407.44 1430.71,481.4 1472.07,522.76 1639.49,522.76 1791.34,674.61 U2.36@1791.34,952.44
PB3: P7.26 U2.89 | length 724.4
  Top Layer w8: U2.89@1811.02,1582.36 1811.02,1644.47 2203.21,2036.65 P7.26@2203.21,2144.36
PB4: P7.25 U2.90 | length 832.6
  Top Layer w8: U2.90@1791.34,1582.36 1791.34,1646.24 2154.49,2009.39 2154.49,2195.64 P7.25@2203.21,2244.36
PB5: P7.28 U2.91 | length 699.3
  Top Layer w8: U2.91@1771.65,1582.36 1771.65,1649.97 2103.21,1981.53 P7.28@2103.21,2144.36
PB6: P5.2 P7.27 P15.A7 P15.B7 U2.92 | length 3465.9
  Top Layer w8: U2.92@1751.97,1582.36 1751.97,1543.14 1767.98,1527.13 v2(1767.98,1526.78) ; v2(1914.85,2154.08) 2005.13,2244.36 P7.27@2103.21,2244.36
  Top Layer w11.8: P15.A7@699.11,2960.27 699.11,3004.8 707.62,3013.32 731,3013.32 738.48,3005.84 738.48,2931.72 737.03,2930.28 737.03,2911.92 737.03,2895.21 737.03,2848.49 754.75,2830.77 934.6,2830.77 1063.04,2959.22 1347.78,2959.22 1423.03,2883.97 1423.03,2789.38 1454,2758.41 P5.2@1454,2756.36 1423.03,2725.39 1423.03,2628.44 1750.53,2300.94 1750.53,1604.3 1750.57,1604.26 U2.92@1750.57,1583.76
  Bottom Layer w8: v2(1767.98,1526.78) 1917.3,1676.09 1917.3,2151.62 v2(1914.85,2154.08)
PB7: P5.3 P6.6 P15.A6 P15.B6 U2.93 | length 3307.8
  Top Layer w8: P6.6@1358.21,2144.36 1359.63,2144.36 1646.5,1857.49 v2@1646.5,1786.36 ; v2(1716,1526) 1716,1526.06 1732.28,1542.34 U2.93@1732.28,1582.36
  Top Layer w11.8: P15.B6@679.42,2960.27 679.42,2912 686.46,2904.96 710.49,2904.96 ; P15.A6@718.79,2960.27 718.79,2931.72 720.23,2930.28 720.23,2914.71 ; U2.93@1733.68,1583.76 1733.68,1604.26 1733.73,1604.3 1733.73,2293.98 1406.23,2621.48 1406.23,2725.39 P5.3@1375.26,2756.36 1375.26,2758.41 1406.23,2789.38 1406.23,2877.01 1340.82,2942.42 1070,2942.42 941.56,2813.97 747.79,2813.97 720.23,2841.53 720.23,2895.21 ; 710.49,2904.96 720.23,2914.71 ; 710.49,2904.96 720.23,2904.96 ; 710.49,2904.96 720.23,2895.21 ; 720.23,2895.21 720.23,2904.96 ; 720.23,2904.96 720.23,2914.71
  Bottom Layer w8: v2(1645.8,1792.18) 1645.8,1596.2 v2(1716,1526)
PB8: P6.8 U2.95 | length 859.9
  Top Layer w8: P6.8@1258.21,2144.36 1258.21,2132.3 1237.37,2111.46 1237.37,1931.36 1260.43,1908.3 1432.08,1908.3 1692.91,1647.46 U2.95@1692.91,1582.36
PB9: P6.7 U2.96 | length 985.7
  Top Layer w8: P6.7@1258.21,2244.36 1209.67,2195.82 1209.67,1921.82 1242.57,1888.92 1433.07,1888.92 1673.23,1648.76 U2.96@1673.23,1582.36
PB10: P9.25 U2.47 | length 675.2
  Top Layer w8: U2.47@2007.87,952.44 2007.87,575.09 1982.83,550.04 1982.83,355.32 P9.25@2030.71,307.44
PB11: P9.26 U2.48 | length 546.3
  Top Layer w8: U2.48@2027.56,952.44 2027.75,952.25 2027.75,410.4 P9.26@2030.71,407.44
PB12: P9.27 U2.51 | length 840.6
  Top Layer w8: P9.27@2130.71,307.44 2084.31,353.84 2084.31,521.62 2207.53,644.83 2207.53,1005.09 2181.44,1031.18 U2.51@2145.67,1031.18
PB13: P9.28 U2.52 | length 738.3
  Top Layer w8: P9.28@2130.71,407.44 2130.71,512.49 2228.3,610.08 2228.3,1002.7 2180.14,1050.86 U2.52@2145.67,1050.86
PB14: P9.29 U2.53 | length 872.4
  Top Layer w8: U2.53@2145.67,1070.55 2178.84,1070.55 2245.85,1003.54 2245.85,564.24 2179.94,498.34 2179.94,358.21 P9.29@2230.71,307.44
PB15: P9.30 U2.54 | length 766.7
  Top Layer w8: U2.54@2145.67,1090.23 2181.01,1090.23 2264.44,1006.8 2264.44,535.42 2230.71,501.7 P9.30@2230.71,407.44
PC0: P6.20 U2.15 | length 1933
  Top Layer w8: P6.20@658.21,2144.36 658.21,1950.75 921.67,1687.29 921.67,1463.33 887.58,1429.24 887.58,1179.54 1080.92,986.2 1258.24,986.2 1340.46,1068.41 1340.46,1130.66 1437.82,1228.03 U2.15@1515.75,1228.03
PC1: P6.19 U2.16 | length 2092.5
  Top Layer w8: P6.19@658.21,2244.36 607.59,2193.74 607.59,1973.85 905.4,1676.03 905.4,1473.49 872.64,1440.73 872.64,1166.53 1066.07,973.11 1265.24,973.11 1355.45,1063.32 1355.45,1125.04 1438.75,1208.34 U2.16@1515.75,1208.34
PC2: P6.22 U2.17 | length 2005.5
  Top Layer w8: P6.22@558.21,2144.36 558.21,2000.21 887.12,1671.3 887.12,1484.81 854.57,1452.27 854.57,1166.22 1062.05,958.74 1271.94,958.74 1368.45,1055.25 1368.45,1115.56 1441.54,1188.66 U2.17@1515.75,1188.66
PC3: P6.21 U2.18 | length 2156.4
  Top Layer w8: P6.21@558.21,2244.36 511.79,2197.94 511.79,2020.44 868.03,1664.2 868.03,1495.46 840.03,1467.46 840.03,1162.38 1059.07,943.34 1276.87,943.34 1381.45,1047.92 1381.45,1109.67 1440.75,1168.97 U2.18@1515.75,1168.97
PC4: P9.11 U2.33 | length 1004.1
  Top Layer w8: P9.11@1330.71,307.44 1330.71,311.65 1281.22,361.14 1281.22,492.66 1361.31,572.75 1620.36,572.75 1732.28,684.67 U2.33@1732.28,952.44
PC5: P9.12 U2.34 | length 854.5
  Top Layer w8: P9.12@1330.71,407.44 1330.71,490.53 1397.14,556.96 1627.61,556.96 1751.97,681.32 U2.34@1751.97,952.44
PC10: P7.13 U2.78 | length 1170.3
  Top Layer w8: U2.78@2027.56,1582.36 2027.56,1614.12 2316.63,1903.18 2635.95,1903.18 2753.31,2020.54 2753.31,2194.46 P7.13@2803.21,2244.36
PC11: P7.16 U2.79 | length 1026.4
  Top Layer w8: U2.79@2007.87,1582.36 2007.87,1618.13 2318.02,1928.28 2619.19,1928.28 2703.21,2012.3 P7.16@2703.21,2144.36
PC12: P7.15 U2.80 | length 1100.3
  Top Layer w8: U2.80@1988.19,1582.36 1988.19,1618.14 2325.32,1955.26 2568,1955.26 2655.34,2042.61 2655.34,2196.49 P7.15@2703.21,2244.36
PC13: P6.15 PC13.1 U2.7 | length 1286.7
  Top Layer w8: P6.15@858.21,2244.36 809.17,2195.32 809.17,1895.94 1198.75,1506.36 1267.29,1506.36 1388.14,1385.51 U2.7@1515.75,1385.51
PC14: P6.18 R12.1 | length 789.8
  Top Layer w8: P6.18@758.21,2144.36 758.21,1912.59 979.81,1690.99 R12.1@979.81,1446.32
PC15: P6.17 R16.1 | length 1046.5
  Top Layer w8: P6.17@758.21,2244.36 708.99,2195.14 708.99,1930.47 939.77,1699.69 939.77,1379.8 962.92,1356.65 963.9,1356.65 978.21,1342.34 R16.1@978.21,1341.36 ; R16.1@988.21,1341.36 R16.1@988.21,1352.34
PD0: P7.18 U2.81 | length 938.9
  Top Layer w8: U2.81@1968.5,1582.36 1968.5,1619.28 2328.68,1979.47 2523.28,1979.47 2603.21,2059.4 P7.18@2603.21,2144.36
PD1: P7.17 U2.82 | length 1026.7
  Top Layer w8: U2.82@1948.82,1582.36 1948.82,1621.39 2327.01,1999.58 2486.93,1999.58 2552.56,2065.22 2552.56,2193.71 P7.17@2603.21,2244.36
PD2: P7.20 U2.83 | length 864.6
  Top Layer w8: U2.83@1929.13,1582.36 1929.13,1622.35 2328.39,2021.6 2439,2021.6 2503.21,2085.81 P7.20@2503.21,2144.36
PD3: P7.19 U2.84 | length 945.7
  Top Layer w8: U2.84@1909.45,1582.36 1909.45,1624.99 2326,2041.54 2390.53,2041.54 2451.93,2102.94 2451.93,2193.08 P7.19@2503.21,2244.36
PD4: P7.22 U2.85 | length 774.7
  Top Layer w8: U2.85@1889.76,1582.36 1889.76,1628.52 2403.21,2141.96 P7.22@2403.21,2144.36
PD5: P7.21 U2.86 | length 882.8
  Top Layer w8: U2.86@1870.08,1582.36 1870.08,1635.51 2358.63,2124.06 2358.63,2199.78 P7.21@2403.21,2244.36
PD6: P7.24 U2.87 | length 749.6
  Top Layer w8: U2.87@1850.39,1582.36 1850.39,1637.01 2303.21,2089.83 P7.24@2303.21,2144.36
PD7: P7.23 U2.88 | length 857.7
  Top Layer w8: U2.88@1830.71,1582.36 1830.71,1642.41 2256.98,2068.68 2256.98,2198.13 P7.23@2303.21,2244.36
PD8: P9.31 U2.55 | length 901.1
  Top Layer w8: U2.55@2145.67,1109.92 2183.18,1109.92 2285.04,1008.06 2285.04,353.11 P9.31@2330.71,307.44
PD9: P9.32 U2.56 | length 821.5
  Top Layer w8: U2.56@2145.67,1129.6 2184.38,1129.6 2330.71,983.27 P9.32@2330.71,407.44
PD10: P9.33 U2.57 | length 983.8
  Top Layer w8: U2.57@2145.67,1149.29 2186.4,1149.29 2384.8,950.89 2384.8,353.35 P9.33@2430.71,307.44
PD11: P9.34 U2.58 | length 904.5
  Top Layer w8: U2.58@2145.67,1168.97 2188.18,1168.97 2430.71,926.45 P9.34@2430.71,407.44
PD12: P9.35 U2.59 | length 1064.9
  Top Layer w8: U2.59@2145.67,1188.66 2186.88,1188.66 2482.5,893.04 2482.5,355.65 P9.35@2530.71,307.44
PD13: P9.36 U2.60 | length 984.7
  Top Layer w8: U2.60@2145.67,1208.34 2187.11,1208.34 2530.71,864.75 P9.36@2530.71,407.44
PD14: P9.37 U2.61 | length 1146.9
  Top Layer w8: U2.61@2145.67,1228.03 2189.06,1228.03 2583.87,833.22 2583.87,354.28 P9.37@2630.71,307.44
PD15: P9.38 U2.62 | length 1064.6
  Top Layer w8: U2.62@2145.67,1247.71 2189.26,1247.71 2630.71,806.26 P9.38@2630.71,409.52
PE0: P6.10 U2.97 | length 894.9
  Top Layer w8: P6.10@1158.21,2144.36 1158.21,1927.31 1211.8,1873.72 1429.88,1873.72 1653.54,1650.06 U2.97@1653.54,1582.36
PE1: P6.9 U2.98 | length 1041.6
  Top Layer w8: P6.9@1158.21,2244.36 1108.32,2194.47 1108.32,1930.09 1184.06,1854.35 1425.23,1854.35 1633.86,1645.72 U2.98@1633.86,1582.36
PE2: P6.12 U2.1 | length 947.7
  Top Layer w8: P6.12@1058.21,2144.36 1058.21,1880.38 1233.45,1705.14 1400.99,1705.14 1473.86,1632.27 1473.86,1512.51 1482.75,1503.62 U2.1@1515.75,1503.62
PE3: P6.11 U2.2 | length 1110.8
  Top Layer w8: P6.11@1058.21,2244.36 1008.52,2194.67 1008.52,1896.2 1214.88,1689.83 1386.22,1689.83 1456.55,1619.5 1456.55,1510.13 1482.75,1483.93 U2.2@1515.75,1483.93
PE4: P6.14 U2.3 | length 1040.6
  Top Layer w8: P6.14@958.21,2144.36 958.21,1915.51 1200.39,1673.33 1371.63,1673.33 1439.6,1605.36 1439.6,1490.53 1465.88,1464.25 U2.3@1515.75,1464.25
PE5: P6.13 U2.4 | length 1206.2
  Top Layer w8: P6.13@958.21,2244.36 911.64,2197.79 911.64,1930.08 1183.13,1658.59 1352.6,1658.59 1424.76,1586.43 1424.76,1471.34 1451.54,1444.56 U2.4@1515.75,1444.56
PE6: P6.16 U2.5 | length 1136.4
  Top Layer w8: P6.16@858.21,2144.36 858.21,1957.58 1172.29,1643.5 1345.3,1643.5 1404.28,1584.52 1404.28,1462.54 1441.94,1424.88 U2.5@1515.75,1424.88
PE7: P9.16 U2.38 | length 719.6
  Top Layer w8: P9.16@1530.71,407.44 1530.71,449.69 1565.66,484.64 1651.59,484.64 1830.71,663.76 U2.38@1830.71,952.44
PE8: P9.17 U2.39 | length 812.2
  Top Layer w8: P9.17@1630.71,307.44 1579.12,359.03 1579.12,444.37 1595.62,460.88 1652.8,460.88 1850.39,658.47 U2.39@1850.39,952.44
PE9: P9.18 U2.40 | length 644.1
  Top Layer w8: P9.18@1630.71,407.44 1870.08,646.81 U2.40@1870.08,952.44
PE10: P9.19 U2.41 | length 752.8
  Top Layer w8: P9.19@1730.71,307.44 1680.12,358.03 1680.12,431.09 1889.76,640.73 U2.41@1889.76,952.44
PE11: P9.20 U2.42 | length 619
  Top Layer w8: P9.20@1730.71,407.44 1730.71,453.77 1909.45,632.51 U2.42@1909.45,952.44
PE12: P9.21 U2.43 | length 725.2
  Top Layer w8: P9.21@1830.71,307.44 1783.07,355.08 1783.07,476.48 1929.13,622.55 U2.43@1929.13,952.44
PE13: P9.22 U2.44 | length 593.9
  Top Layer w8: P9.22@1830.71,407.44 1830.71,499 1948.82,617.11 U2.44@1948.82,952.44
PE14: P9.23 U2.45 | length 703.4
  Top Layer w8: P9.23@1930.71,307.44 1879.17,358.98 1879.17,518.96 1968.5,608.29 U2.45@1968.5,952.44
PE15: P9.24 U2.46 | length 568.8
  Top Layer w8: P9.24@1930.71,407.44 1930.71,536.72 1988.19,594.2 U2.46@1988.19,952.44
VBAT: C12.2 D2.1 P11.3 U2.6 | length 1844.3
  Top Layer w8: C12.2@1293.69,1585.69 1368.61,1510.77 ; C12.2@1293.9,1593.06 v2(1293.9,1613.38) ; C12.2@1296.53,1575.14 1368.61,1503.06 ; U2.6@1515.75,1405.19 1433.6,1405.19 ; 1368.61,1503.06 1368.61,1510.77 ; 1368.61,1503.06 1368.61,1463.66 1374.89,1457.38 ; 1368.61,1510.77 1374.89,1504.49 1374.89,1463.9 ; 1374.89,1457.38 1374.89,1463.9 ; 1374.89,1457.38 1427.08,1405.19 1433.6,1405.19 ; 1374.89,1463.9 1433.6,1405.19
  Top Layer w30: D2.1@699.12,1456.36 701.17,1456.36 702.51,1455.02 v2(702.51,1427.93) v2@702.51,1398.74 ; v2(702.05,1398.74) 702.68,1398.11 702.68,1066.89 P11.3@708.21,1061.36 ; C12.2@1292.04,1591.19 1293.9,1593.06 1314.22,1613.38 1325.05,1613.38 v2(1325.25,1613.58)
  Bottom Layer w30: v2(702.05,1398.74) v2@702.51,1399.19 ; 1277.35,1610.93 1322.6,1610.93 v2(1325.25,1613.58) ; v2@1322.36,1612.61 1321.6,1613.38 v2(1293.9,1613.38) 1072.4,1613.38 886.96,1427.93 731.25,1427.93 ; v2@702.51,1399.19 731.25,1427.93 ; v2@702.51,1399.19 v2(702.51,1427.93) 731.25,1427.93
VDD: C45.1 C46.1 C47.2 D2.2 P6.2 P6.4 P10.7 P10.8 P11.5 U2.11 U2.28 U2.75 | length 7023.3
  Top Layer w10: C46.1@1290.39,1251.48 1290.56,1251.66 1350.23,1251.66 1405.35,1306.77 ; v2@1312.64,1260.43 1348.08,1260.43 1394.42,1306.77 1405.35,1306.77 ; U2.11@1515.75,1306.77 1405.35,1306.77 ; v2(1621.21,850.36) 1633.86,863.01 U2.28@1633.86,952.44 ; U2.75@2145.67,1503.62 2177.91,1503.62 2200.82,1526.53 ; U2.75@2165.67,1504.12 2173.18,1511.63 2177.54,1511.63 2200.82,1534.91 ; C45.1@2204.3,1626.96 2200.82,1623.48 2200.82,1534.91 ; C45.1@2207.3,1629.96 2208.93,1628.32 2208.93,1534.64 2200.82,1526.53 ; 2200.82,1526.53 2200.82,1534.91
  Top Layer w30: v2(137.77,1110.02) 137.77,1093.41 ; v2(141.94,1150.3) 141.94,1097.58 137.77,1093.41 ; P10.8@357.21,636.36 P10.7@257.21,636.36 184.75,636.36 137.77,683.35 137.77,1093.41 ; v2(606.21,1323.05) 606.21,1355.52 v2(607.15,1356.45) ; D2.2@606.21,1456.36 606.87,1456.36 608.21,1455.02 608.21,1284.02 P11.5@608.21,1061.36 ; P6.4@1458.21,2144.36 P6.2@1558.21,2144.36 ; v2(1621.21,850.36) 1621.21,820.6 C47.2@1621.35,820.46 ; v2@2141.91,1629.96 C45.1@2207.3,1629.96 2204.3,1626.96 2172.19,1626.96 v2(2169.66,1624.43)
  Bottom Layer w30: P11.5@608.21,1061.36 P11.5@608.21,1065.07 ; v2(1312.64,1262.13) 1391.06,1262.13 1485.62,1356.69 1485.62,1439.81 ; 1405.67,1278.86 1400.72,1273.91 689.69,1273.91 640.55,1323.05 ; P6.2@1558.21,2144.36 1556.91,2143.06 1556.91,2084.36 1485.62,2013.07 1485.62,1517.02 ; v2(1621.21,850.36) 1567.09,850.36 1505.09,788.36 1202.98,788.36 844.2,1147.14 642.58,1147.14 ; 182.22,1110.02 563.26,1110.02 ; 182.22,1110.02 v2(137.77,1110.02) 137.77,1146.13 v2(141.94,1150.3) 182.22,1110.02 ; 563.26,1110.02 573.78,1099.5 P11.5@608.21,1065.07 ; 563.26,1110.02 584.29,1110.02 621.42,1147.14 642.58,1147.14 ; P11.5@608.21,1065.07 608.21,1112.77 642.58,1147.14 ; 640.55,1323.05 v2(607.15,1356.45) 607.15,1323.99 v2(606.21,1323.05) 640.55,1323.05 ; 1485.62,1439.81 1524.23,1478.42 ; 1485.62,1439.81 1485.62,1478.42 ; 1485.62,1478.42 1524.23,1478.42 ; 1485.62,1478.42 1485.62,1517.02 ; 1485.62,1517.02 1524.23,1478.42 ; 1524.23,1478.42 2098.62,1478.42 2169.66,1549.46 2169.66,1596.77 ; 2169.66,1596.77 2137.91,1628.52 v2(2141.91,1628.52) 2165.57,1628.52 v2(2169.66,1624.43) 2169.66,1596.77
VDDA: C13.1 R18.1 R19.2 U2.22 | length 1403.7
  Top Layer w8: C13.1@1402.03,927.4 1414.55,939.91 1444.25,969.62 1444.25,975.71 1444.25,979.56 1444.25,1065.63 1466.06,1087.44 1468.85,1090.23 ; C13.1@1413.06,941.4 1415.08,941.4 1415.08,949.89 1440.91,975.71 1440.91,1065.63 1440.91,1067.88 1441.45,1068.43 1463.26,1090.23 1468.85,1090.23 ; U2.22@1515.75,1090.23 1468.85,1090.23
  Top Layer w25: R18.1@675.15,689.26 R19.2@675.15,618.26 675.15,583.26 689.79,568.62 863.45,568.62 1106.8,811.96 1259.39,811.96 1369.33,921.9 1400.53,921.9 1402.03,923.4 C13.1@1402.03,927.4
VIO: C5.1 C42.2 P6.1 P6.3 P11.1 R19.1 S4.1 U2.50 U2.100 | length 7353.7
  Top Layer w8: U2.100@1594.49,1582.36 1594.49,1617.88 ; U2.50@2066.93,952.44 2066.93,903.82 ; C5.1@2097,820.88 2096.53,821.36 C5.1@2094.87,823.02 ; 1594.49,1617.88 1594.49,1627.88 1473.69,1748.68 C42.2@1439.49,1748.68 1446.26,1741.91 1470.47,1741.91 1594.49,1617.88 ; 2066.93,903.82 2066.93,894.85 2093.21,868.57 C5.1@2093.21,821.36 C5.1@2094.87,823.02 ; 2066.93,903.82 2100.73,870.02 2100.73,828.88 C5.1@2094.87,823.02
  Top Layer w22: v2(1430.95,1777.93) 1430.95,1776.31 1432.49,1774.77 1432.49,1755.68 C42.2@1439.49,1748.68
  Top Layer w30: v2(769.37,618.18) 735.85,618.18 R19.1@735.78,618.26 801.27,618.26 v2(802.15,619.14) ; v2(808.21,1621.36) v2(787.77,1600.92) 767.34,1580.49 767.34,1136.97 796.86,1107.44 796.86,1072.7 819.54,1050.02 855.6,1050.02 891.89,1013.74 891.89,793.91 ; v2@919.56,763.15 918.86,763.85 v2(891.89,763.85) 891.89,793.91 ; v2(922.56,763.23) 891.89,793.91 ; C5.1@2093.21,821.36 2096.53,821.36 2154.95,821.36 v2(2156.39,819.93) ; C5.1@2097,820.88 v2(2127.04,820.88) ; v3(2509.37,999.27) 2718.41,790.22 2718.41,625.31 2770.89,572.84 3323.07,572.84 3373.93,521.98 3373.93,245.33 3426.66,192.61 3511.47,192.61 S4.1@3512.71,191.36
  Bottom Layer w22: v2(808.21,1621.36) 878.92,1692.07 1377.15,1692.07 ; P6.3@1458.21,2244.36 1407.64,2193.79 1407.64,1801.25 1419.29,1789.59 ; 1377.15,1692.07 1398.94,1692.07 1430.95,1724.09 v2(1430.95,1777.93) 1419.29,1789.59 ; 1377.15,1692.07 1419.29,1734.22 1419.29,1789.59
  Bottom Layer w30: v2(787.77,1600.92) v2(808.21,1621.36) ; 826.86,675.67 802.15,650.96 ; P6.3@1458.21,2244.36 P6.1@1558.21,2244.36 ; v3(2509.37,999.27) 2335.73,999.27 v2(2156.39,819.93) ; 802.15,650.96 v2(769.37,618.18) 801.19,618.18 v2(802.15,619.14) 802.15,650.96 ; 802.15,650.96 884.36,733.17 ; 884.36,733.17 891.89,740.7 v2(891.89,763.85) v2@892.5,763.23 ; 884.36,733.17 922.56,733.17 ; v2@892.5,763.23 922.56,733.17 ; v2@892.5,763.23 v2(922.56,763.23) 922.56,733.17 ; 922.56,733.17 1030.78,624.95 2067.96,624.95 2127.04,684.03 2127.04,790.58 ; 2127.04,790.58 v2(2156.39,819.93) ; 2127.04,790.58 v2(2127.04,820.88) 2155.43,820.88 v2(2156.39,819.93)
VREF+: R18.2 U2.21 | length 991.5
  Top Layer w8: R18.2@735.78,689.26 934.42,689.26 1094.45,849.28 1254.09,849.28 1425.59,1020.78 1425.59,1084.5 1451.01,1109.92 U2.21@1515.75,1109.92
VREF-: R17.2 U2.20 | length 994.7
  Top Layer w8: R17.2@735.78,760.26 765.99,760.26 798,728.24 939.7,728.24 1082.06,870.6 1253.37,870.6 1412.16,1029.4 1412.16,1089.45 1452.31,1129.6 U2.20@1515.75,1129.6
X32KI: C9.2 R12.2 U2.8 Y2.1 | length 491
  Top Layer w8: R12.2@1038.84,1444.36 1041.84,1441.36 Y2.1@1138.21,1441.36 ; Y2.1@1158.21,1441.36 1252.95,1441.36 1276.4,1417.9 1276.4,1416.61 1289.51,1403.5 1290.8,1403.5 1290.8,1402.21 1304.4,1388.61 1305.7,1388.61 1328.48,1365.82 U2.8@1515.75,1365.82
X32KO: C10.2 R16.2 U2.9 Y2.2 | length 517.8
  Top Layer w8: R16.2@1038.84,1341.36 1040.41,1342.93 Y2.2@1138.21,1342.93 1186.25,1294.89 1281.61,1294.89 1290.4,1303.68 C10.2@1290.4,1333.23 ; C10.2@1303.31,1346.14 U2.9@1515.75,1346.14
XI: C7.2 U2.12 Y1.1 | length 542.7
  Top Layer w8: Y1.1@1063.21,1190.91 1063.21,1186.97 1102.83,1147.36 1269.09,1147.36 1288.36,1166.62 1288.36,1187.07 1295.19,1193.89 1326.63,1193.89 1419.82,1287.08 U2.12@1515.75,1287.08
XO: C8.2 U2.13 Y1.3 | length 513.7
  Top Layer w8: Y1.3@1138.01,1100.36 1138.01,1096.42 1155.67,1078.77 1159.6,1078.77 1175.11,1063.26 1282.95,1063.26 1290.4,1070.7 C8.2@1290.4,1099.73 1293.9,1103.23 1293.9,1131.75 1429.55,1267.4 U2.13@1515.75,1267.4
pads on no net: P2. P2.7 P14.A8 P14.B8 P15.A8 P15.B8 S1.0 S1.3 U1. U2.0

## Polygon pours and split planes (outlines as drawn)
GND on Top Layer "GND" (hatched Horizontal grid 8 track 8, remove dead copper, pour order 0): 0,3267.72 0,0 3661.42,0 3661.42,3267.72
GND on Bottom Layer "GND" (hatched Horizontal grid 8 track 8, remove dead copper, pour order 1): 0,3267.72 0,0 3661.42,0 3661.42,3267.72

## Keep-outs
Keep-Out Layer:
  the board outline again, w10

## Other copper
Top Layer:
  region net GND: 229.6,3255.14 12.2,3255.14 12.2,2948.41 229.6,2948.41
  rectangle net GND: 3429.39,2948.41 3649.22,3255.14